# Altium PCB PCB尺子2.PcbDoc (part 3 of 3)
Units mm, origin at the board's own origin, x right, y up, seen from the top; angles counter-clockwise.
Board outline 210 x 35 mm, 2 copper layers (Top Layer, Bottom Layer); 21 components, 0 nets, 1047 pads, 0 vias.
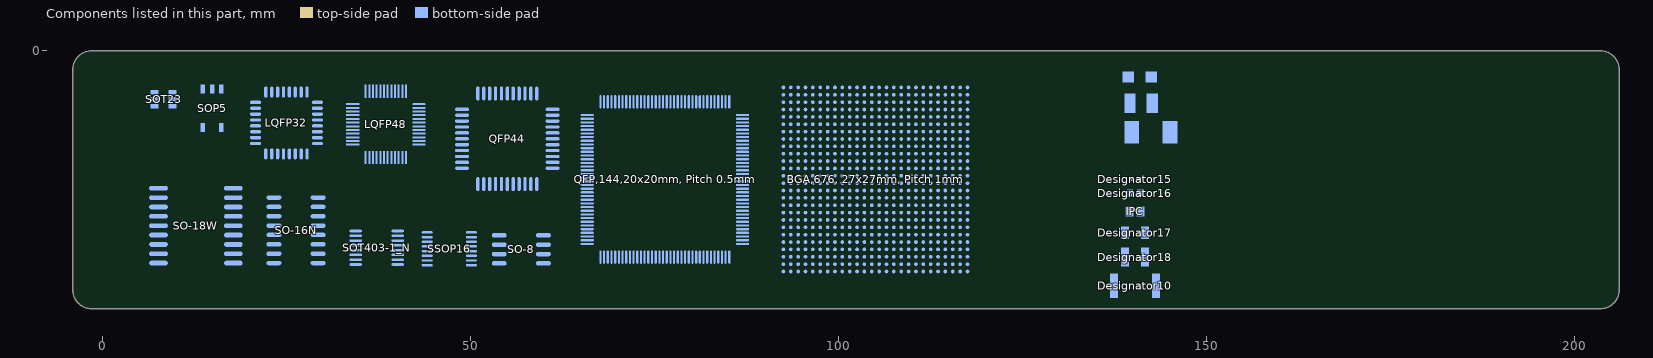
[diagram p3: the components of this part, seen from the top]

## Nets (pads, with @x,y where several pads share a name; then routed paths per layer and width w, separated by ;. In a path a pad name is that pad's centre, name@x,y a point inside that pad or via, vN(x,y) a via of type N, cw(c..) or ccw(c..) an arc to the next point about the centre after c; other vN are vias at no path point) (continued)
copper on no net: | length 2144.7
  Top Layer w0.2: 200,-4.5 200,0
  Top Layer w0.254: 0,-34.997 0,-31.997 ; 0,-31.972 171.455,-31.972 ; 0,0 0,-2.5 201.9,-2.5 201.9,0 ; 1,-2.5 1,0 ; 1.275,-34.997 1.275,-31.997 ; 2,-2.5 2,0 ; 2.545,-34.997 2.545,-31.997 ; 3,-2.5 3,0 ; 3.815,-34.997 3.815,-31.997 ; 4,-2.5 4,0 ; 5,-3.5 5,0 ; 5.085,-34.997 5.085,-31.997 ; 6,-2.5 6,0 ; 6.355,-34.997 6.355,-31.997 ; 7,-2.5 7,0 ; 7.625,-34.997 7.625,-31.997 ; 8,-2.5 8,0 ; 8.895,-34.997 8.895,-31.997 ; 9,-2.5 9,0 ; 10,-4.5 10,0 ; 10.165,-34.997 10.165,-31.997 ; 11,-2.5 11,0 ; 11.435,-34.997 11.435,-31.997 ; 12,-2.5 12,0 ; 12.705,-34.997 12.705,-30.997 ; 13,-2.5 13,0 ; 13.975,-34.997 13.975,-31.997 ; 14,-2.5 14,0 ; 15,-3.5 15,0 ; 15.245,-34.997 15.245,-31.997 ; 16,-2.5 16,0 ; 16.515,-34.997 16.515,-31.997 ; 17,-2.5 17,0 ; 17.785,-34.997 17.785,-31.997 ; 18,-2.5 18,0 ; 19,-2.5 19,0 ; 19.055,-34.997 19.055,-31.997 ; 20,-4.5 20,0 ; 20.325,-34.997 20.325,-31.997 ; 21,-2.5 21,0 ; 21.595,-34.997 21.595,-31.997 ; 22,-2.5 22,0 ; 22.865,-34.997 22.865,-31.997 ; 23,-2.5 23,0 ; 24,-2.5 24,0 ; 24.135,-34.997 24.135,-31.997 ; 25,-3.5 25,0 ; 25.405,-34.997 25.405,-29.997 ; 26,-2.5 26,0 ; 26.675,-34.997 26.675,-31.997 ; 27,-2.5 27,0 ; 27.945,-34.997 27.945,-31.997 ; 28,-2.5 28,0 ; 29,-2.5 29,0 ; 29.215,-34.997 29.215,-31.997 ; 30,-4.5 30,0 ; 30.485,-34.997 30.485,-31.997 ; 31,-2.5 31,0 ; 31.755,-34.997 31.755,-31.997 ; 32,-2.5 32,0 ; 33,-2.5 33,0 ; 33.025,-34.997 33.025,-31.997 ; 34,-2.5 34,0 ; 34.295,-34.997 34.295,-31.997 ; 35,-3.5 35,0 ; 35.565,-34.997 35.565,-31.997 ; 36,-2.5 36,0 ; 36.835,-34.997 36.835,-31.997 ; 37,-2.5 37,0 ; 38,-2.5 38,0 ; 38.105,-34.997 38.105,-30.997 ; 39,-2.5 39,0 ; 39.375,-34.997 39.375,-31.997 ; 40,-4.5 40,0 ; 40.645,-34.997 40.645,-31.997 ; 41,-2.5 41,0 ; 41.915,-34.997 41.915,-31.997 ; 42,-2.5 42,0 ; 43,-2.5 43,0 ; 43.185,-34.997 43.185,-31.997 ; 44,-2.5 44,0 ; 44.455,-34.997 44.455,-31.997 ; 45,-3.5 45,0 ; 45.725,-34.997 45.725,-31.997 ; 46,-2.5 46,0 ; 46.995,-34.997 46.995,-31.997 ; 47,-2.5 47,0 ; 48,-2.5 48,0 ; 48.265,-34.997 48.265,-31.997 ; 49,-2.5 49,0 ; 49.535,-34.997 49.535,-31.997 ; 50,-4.5 50,0 ; 50.805,-34.997 50.805,-29.997 ; 51,-2.5 51,0 ; 52,-2.5 52,0 ; 52.075,-34.997 52.075,-31.997 ; 53,-2.5 53,0 ; 53.345,-34.997 53.345,-31.997 ; 54,-2.5 54,0 ; 54.615,-34.997 54.615,-31.997 ; 55,-3.5 55,0 ; 55.885,-34.997 55.885,-31.997 ; 56,-2.5 56,0 ; 57,-2.5 57,0 ; 57.155,-34.997 57.155,-31.997 ; 58,-2.5 58,0 ; 58.425,-34.997 58.425,-31.997 ; 59,-2.5 59,0 ; 59.695,-34.997 59.695,-31.997 ; 60,-4.5 60,0 ; 60.965,-34.997 60.965,-31.997 ; 61,-2.5 61,0 ; 62,-2.5 62,0 ; 62.235,-34.997 62.235,-31.997 ; 63,-2.5 63,0 ; 63.505,-34.997 63.505,-30.997 ; 64,-2.5 64,0 ; 64.775,-34.997 64.775,-31.997 ; 65,-3.5 65,0 ; 66,-2.5 66,0 ; 66.045,-34.997 66.045,-31.997 ; 67,-2.5 67,0 ; 67.315,-34.997 67.315,-31.997 ; 68,-2.5 68,0 ; 68.585,-34.997 68.585,-31.997 ; 69,-2.5 69,0 ; 69.855,-34.997 69.855,-31.997 ; 70,-4.5 70,0 ; 71,-2.5 71,0 ; 71.125,-34.997 71.125,-31.997 ; 72,-2.5 72,0 ; 72.395,-34.997 72.395,-31.997 ; 73,-2.5 73,0 ; 73.665,-34.997 73.665,-31.997 ; 74,-2.5 74,0 ; 74.935,-34.997 74.935,-31.997 ; 75,-3.5 75,0 ; 76,-2.5 76,0 ; 76.205,-34.997 76.205,-29.997 ; 77,-2.5 77,0 ; 77.475,-34.997 77.475,-31.997 ; 78,-2.5 78,0 ; 78.745,-34.997 78.745,-31.997 ; 79,-2.5 79,0 ; 80,-4.5 80,0 ; 80.015,-34.997 80.015,-31.997 ; 81,-2.5 81,0 ; 81.285,-34.997 81.285,-31.997 ; 82,-2.5 82,0 ; 82.555,-34.997 82.555,-31.997 ; 83,-2.5 83,0 ; 83.825,-34.997 83.825,-31.997 ; 84,-2.5 84,0 ; 85,-3.5 85,0 ; 85.095,-34.997 85.095,-31.997 ; 86,-2.5 86,0 ; 86.365,-34.997 86.365,-31.997 ; 87,-2.5 87,0 ; 87.635,-34.997 87.635,-31.997 ; 88,-2.5 88,0 ; 88.905,-34.997 88.905,-30.997 ; 89,-2.5 89,0 ; 90,-4.5 90,0 ; 90.175,-34.997 90.175,-31.997 ; 91,-2.5 91,0 ; 91.445,-34.997 91.445,-31.997 ; 92,-2.5 92,0 ; 92.715,-34.997 92.715,-31.997 ; 93,-2.5 93,0 ; 93.985,-34.997 93.985,-31.997 ; 94,-2.5 94,0 ; 95,-3.5 95,0 ; 95.255,-34.997 95.255,-31.997 ; 96,-2.5 96,0 ; 96.525,-34.997 96.525,-31.997 ; 97,-2.5 97,0 ; 97.795,-34.997 97.795,-31.997 ; 98,-2.5 98,0 ; 99,-2.5 99,0 ; 99.065,-34.997 99.065,-31.997 ; 100,-4.5 100,0 ; 100.335,-34.997 100.335,-31.997 ; 101,-2.5 101,0 ; 101.605,-34.997 101.605,-29.997 ; 102,-2.5 102,0 ; 102.875,-34.997 102.875,-31.997 ; 103,-2.5 103,0 ; 104,-2.5 104,0 ; 104.145,-34.997 104.145,-31.997 ; 105,-3.5 105,0 ; 105.415,-34.997 105.415,-31.997 ; 106,-2.5 106,0 ; 106.685,-34.997 106.685,-31.997 ; 107,-2.5 107,0 ; 107.955,-34.997 107.955,-31.997 ; 108,-2.5 108,0 ; 109,-2.5 109,0 ; 109.225,-34.997 109.225,-31.997 ; 110,-4.5 110,0 ; 110.495,-34.997 110.495,-31.997 ; 111,-2.5 111,0 ; 111.765,-34.997 111.765,-31.997 ; 112,-2.5 112,0 ; 113,-2.5 113,0 ; 113.035,-34.997 113.035,-31.997 ; 114,-2.5 114,0 ; 114.305,-34.997 114.305,-30.997 ; 115,-3.5 115,0 ; 115.575,-34.997 115.575,-31.997 ; 116,-2.5 116,0 ; 116.845,-34.997 116.845,-31.997 ; 117,-2.5 117,0 ; 118,-2.5 118,0 ; 118.115,-34.997 118.115,-31.997 ; 119,-2.5 119,0 ; 119.385,-34.997 119.385,-31.997 ; 120,-4.5 120,0 ; 120.655,-34.997 120.655,-31.997 ; 121,-2.5 121,0 ; 121.925,-34.997 121.925,-31.997 ; 122,-2.5 122,0 ; 123,-2.5 123,0 ; 123.195,-34.997 123.195,-31.997 ; 124,-2.5 124,0 ; 124.465,-34.997 124.465,-31.997 ; 125,-3.5 125,0 ; 125.735,-34.997 125.735,-31.997 ; 126,-2.5 126,0 ; 127,-2.5 127,0 ; 127.005,-34.997 127.005,-29.997 ; 128,-2.5 128,0 ; 128.275,-34.997 128.275,-31.997 ; 129,-2.5 129,0 ; 129.545,-34.997 129.545,-31.997 ; 130,-4.5 130,0 ; 130.815,-34.997 130.815,-31.997 ; 131,-2.5 131,0 ; 132,-2.5 132,0 ; 132.085,-34.997 132.085,-31.997 ; 133,-2.5 133,0 ; 133.355,-34.997 133.355,-31.997 ; 134,-2.5 134,0 ; 134.625,-34.997 134.625,-31.997 ; 135,-3.5 135,0 ; 135.895,-34.997 135.895,-31.997 ; 136,-2.5 136,0 ; 137,-2.5 137,0 ; 137.165,-34.997 137.165,-31.997 ; 138,-2.5 138,0 ; 138.435,-34.997 138.435,-31.997 ; 139,-2.5 139,0 ; 139.705,-34.997 139.705,-30.997 ; 140,-4.5 140,0 ; 140.975,-34.997 140.975,-31.997 ; 141,-2.5 141,0 ; 142,-2.5 142,0 ; 142.245,-34.997 142.245,-31.997 ; 143,-2.5 143,0 ; 143.515,-34.997 143.515,-31.997 ; 144,-2.5 144,0 ; 144.785,-34.997 144.785,-31.997 ; 145,-3.5 145,0 ; 146,-2.5 146,0 ; 146.055,-34.997 146.055,-31.997 ; 147,-2.5 147,0 ; 147.325,-34.997 147.325,-31.997 ; 148,-2.5 148,0 ; 148.595,-34.997 148.595,-31.997 ; 149,-2.5 149,0 ; 149.865,-34.997 149.865,-31.997 ; 150,-4.5 150,0 ; 151,-2.5 151,0 ; 151.135,-34.997 151.135,-31.997 ; 152,-2.5 152,0 ; 152.405,-34.997 152.405,-29.997 ; 153,-2.5 153,0 ; 153.675,-34.997 153.675,-31.997 ; 154,-2.5 154,0 ; 154.945,-34.997 154.945,-31.997 ; 155,-3.5 155,0 ; 156,-2.5 156,0 ; 156.215,-34.997 156.215,-31.997 ; 157,-2.5 157,0 ; 157.485,-34.997 157.485,-31.997 ; 158,-2.5 158,0 ; 158.755,-34.997 158.755,-31.997 ; 159,-2.5 159,0 ; 160,-4.5 160,0 ; 160.025,-34.997 160.025,-31.997 ; 161,-2.5 161,0 ; 161.295,-34.997 161.295,-31.997 ; 162,-2.5 162,0 ; 162.565,-34.997 162.565,-31.997 ; 163,-2.5 163,0 ; 163.835,-34.997 163.835,-31.997 ; 164,-2.5 164,0 ; 165,-3.5 165,0 ; 165.105,-34.997 165.105,-30.997 ; 166,-2.5 166,0 ; 166.375,-34.997 166.375,-31.997 ; 167,-2.5 167,0 ; 167.645,-34.997 167.645,-31.997 ; 168,-2.5 168,0 ; 168.915,-34.997 168.915,-31.997 ; 169,-2.5 169,0 ; 170,-4.5 170,0 ; 170.185,-34.997 170.185,-31.997 ; 171,-2.5 171,0 ; 171.455,-34.997 171.455,-31.997 ; 172,-2.5 172,0 ; 173,-2.5 173,0 ; 174,-2.5 174,0 ; 174.178,-19.332 174.686,-19.332 ; 174.178,-19.078 174.432,-19.078 ; 174.178,-18.824 174.432,-18.824 ; 174.178,-18.57 174.432,-18.57 ; 174.178,-18.316 174.432,-18.316 ; 174.178,-18.062 174.432,-18.062 ; 174.178,-17.808 174.432,-17.808 ; 174.178,-17.554 174.432,-17.554 ; 174.178,-17.3 174.432,-17.3 ; 174.178,-17.046 174.432,-17.046 ; 174.178,-16.792 174.432,-16.792 ; 174.178,-16.538 174.432,-16.538 ; 174.178,-16.284 174.432,-16.284 ; 174.178,-16.03 174.686,-16.03 ; 174.432,-20.348 174.686,-20.348 ; 174.432,-20.094 174.686,-20.094 ; 174.432,-19.84 174.686,-19.84 ; 174.432,-19.586 174.686,-19.586 ; 174.432,-15.776 174.686,-15.776 ; 174.432,-15.522 174.686,-15.522 ; 174.432,-15.268 174.686,-15.268 ; 174.432,-15.014 174.686,-15.014 ; 174.432,-14.76 174.94,-14.76 ; 174.686,-21.11 174.94,-21.11 ; 174.686,-20.856 174.94,-20.856 ; 174.686,-20.602 174.94,-20.602 ; 174.686,-14.506 174.94,-14.506 ; 174.686,-14.252 174.94,-14.252 ; 174.686,-13.998 175.194,-13.998 ; 174.94,-21.872 175.448,-21.872 ; 174.94,-21.618 175.194,-21.618 ; 174.94,-21.364 175.194,-21.364 ; 174.94,-13.744 175.194,-13.744 ; 174.94,-13.49 175.194,-13.49 ; 175,-3.5 175,0 ; 175.194,-22.38 175.702,-22.38 ; 175.194,-22.126 175.448,-22.126 ; 175.194,-13.236 175.448,-13.236 ; 175.194,-12.982 175.448,-12.982 ; 175.448,-22.888 175.956,-22.888 ; 175.448,-22.634 175.702,-22.634 ; 175.448,-12.728 175.702,-12.728 ; 175.448,-12.474 175.702,-12.474 ; 175.702,-23.142 175.956,-23.142 ; 175.702,-12.22 175.956,-12.22 ; 175.702,-11.966 176.21,-11.966 ; 175.956,-23.65 193.228,-23.65 ; 175.956,-23.396 176.21,-23.396 ; 175.956,-20.856 181.29,-20.856 ; 175.956,-20.602 181.29,-20.602 ; 175.956,-20.348 177.988,-20.348 ; 175.956,-20.094 177.988,-20.094 ; 175.956,-19.84 177.988,-19.84 ; 175.956,-19.586 177.988,-19.586 ; 175.956,-19.332 177.988,-19.332 ; 175.956,-19.078 177.988,-19.078 ; 175.956,-18.824 177.988,-18.824 ; 175.956,-18.57 177.988,-18.57 ; 175.956,-18.316 177.988,-18.316 ; 175.956,-18.062 177.988,-18.062 ; 175.956,-17.808 177.988,-17.808 ; 175.956,-17.554 177.988,-17.554 ; 175.956,-17.3 177.988,-17.3 ; 175.956,-17.046 177.988,-17.046 ; 175.956,-16.792 177.988,-16.792 ; 175.956,-16.538 177.988,-16.538 ; 175.956,-16.284 177.988,-16.284 ; 175.956,-16.03 177.988,-16.03 ; 175.956,-15.776 177.988,-15.776 ; 175.956,-15.522 177.988,-15.522 ; 175.956,-15.268 177.988,-15.268 ; 175.956,-15.014 177.988,-15.014 ; 175.956,-14.76 181.29,-14.76 ; 175.956,-14.506 181.29,-14.506 ; 175.956,-14.252 181.29,-14.252 ; 175.956,-11.712 193.482,-11.712 ; 176,-2.5 176,0 ; 176.21,-23.904 176.464,-23.904 ; 176.21,-21.364 181.036,-21.364 ; 176.21,-21.11 181.29,-21.11 ; 176.21,-13.998 181.29,-13.998 ; 176.21,-11.458 176.464,-11.458 ; 176.464,-24.158 176.718,-24.158 ; 176.464,-23.396 178.496,-23.396 ; 176.464,-13.744 181.036,-13.744 ; 176.464,-11.204 176.718,-11.204 ; 176.464,-10.95 176.972,-10.95 ; 176.718,-24.412 176.972,-24.412 ; 176.718,-21.618 180.782,-21.618 ; 176.718,-10.696 177.226,-10.696 ; 176.972,-24.666 177.226,-24.666 ; 176.972,-10.442 177.48,-10.442 ; 177,-2.5 177,0 ; 177.226,-24.92 177.48,-24.92 ; 177.226,-13.49 180.02,-13.49 ; 177.226,-10.188 177.734,-10.188 ; 177.48,-25.174 177.734,-25.174 ; 177.48,-9.934 177.988,-9.934 ; 177.734,-25.428 177.988,-25.428 ; 177.734,-9.68 178.242,-9.68 ; 177.988,-25.682 178.496,-25.682 ; 177.988,-9.426 191.196,-9.426 ; 178,-2.5 178,0 ; 178.242,-25.936 179.766,-25.936 ; 178.496,-26.19 179.004,-26.19 ; 178.496,-11.458 179.004,-11.458 ; 178.496,-9.172 179.004,-9.172 ; 178.75,-24.158 179.004,-24.158 ; 178.75,-23.904 179.004,-23.904 ; 178.75,-11.204 179.004,-11.204 ; 178.75,-10.95 179.258,-10.95 ; 178.75,-8.918 179.258,-8.918 ; 179,-2.5 179,0 ; 179.004,-26.444 179.512,-26.444 ; 179.004,-25.682 179.258,-25.682 ; 179.004,-24.666 179.512,-24.666 ; 179.004,-24.412 179.258,-24.412 ; 179.004,-23.396 181.036,-23.396 ; 179.004,-10.696 179.258,-10.696 ; 179.258,-26.698 180.02,-26.698 ; 179.258,-24.92 179.512,-24.92 ; 179.258,-20.348 181.29,-20.348 ; 179.258,-19.586 181.29,-19.586 ; 179.258,-10.442 179.512,-10.442 ; 179.258,-10.188 179.766,-10.188 ; 179.258,-8.664 179.766,-8.664 ; 179.512,-25.174 179.766,-25.174 ; 179.512,-20.094 181.29,-20.094 ; 179.512,-19.84 181.29,-19.84 ; 179.512,-19.332 181.29,-19.332 ; 179.512,-16.284 179.766,-16.284 ; 179.512,-16.03 180.274,-16.03 ; 179.512,-15.776 181.036,-15.776 ; 179.512,-15.522 181.29,-15.522 ; 179.512,-15.268 181.29,-15.268 ; 179.512,-15.014 181.29,-15.014 ; 179.512,-9.934 179.766,-9.934 ; 179.512,-8.41 180.274,-8.41 ; 179.766,-26.952 180.528,-26.952 ; 179.766,-25.682 180.274,-25.682 ; 179.766,-25.428 180.02,-25.428 ; 179.766,-9.68 180.02,-9.68 ; 180,-4.5 180,0 ; 180.02,-25.936 189.418,-25.936 ; 180.02,-19.078 181.29,-19.078 ; 180.02,-8.156 180.782,-8.156 ; 180.274,-27.206 181.036,-27.206 ; 180.274,-26.19 180.782,-26.19 ; 180.274,-9.172 180.528,-9.172 ; 180.528,-26.444 181.036,-26.444 ; 180.528,-8.918 180.782,-8.918 ; 180.528,-7.902 181.29,-7.902 ; 180.782,-26.698 181.29,-26.698 ; 180.782,-25.682 181.29,-25.682 ; 180.782,-18.824 181.29,-18.824 ; 180.782,-8.664 181.036,-8.664 ; 181,-2.5 181,0 ; 181.036,-27.46 182.56,-27.46 ; 181.036,-24.158 181.29,-24.158 ; 181.036,-23.904 181.29,-23.904 ; 181.036,-11.458 181.29,-11.458 ; 181.036,-11.204 181.29,-11.204 ; 181.036,-10.95 181.544,-10.95 ; 181.036,-8.41 181.544,-8.41 ; 181.29,-26.952 181.544,-26.952 ; 181.29,-24.92 181.798,-24.92 ; 181.29,-24.666 181.544,-24.666 ; 181.29,-24.412 181.544,-24.412 ; 181.29,-23.396 188.148,-23.396 ; 181.29,-10.696 181.544,-10.696 ; 181.29,-10.442 181.544,-10.442 ; 181.29,-7.648 182.814,-7.648 ; 181.544,-27.206 182.052,-27.206 ; 181.544,-25.682 182.052,-25.682 ; 181.544,-25.428 181.798,-25.428 ; 181.544,-25.174 181.798,-25.174 ; 181.544,-10.188 181.798,-10.188 ; 181.544,-9.934 181.798,-9.934 ; 181.544,-9.68 182.052,-9.68 ; 181.544,-8.156 181.798,-8.156 ; 181.544,-7.902 182.306,-7.902 ; 181.798,-27.714 183.83,-27.714 ; 182,-2.5 182,0 ; 182.052,-26.19 182.306,-26.19 ; 182.052,-9.172 182.306,-9.172 ; 182.052,-8.918 182.306,-8.918 ; 182.306,-26.698 182.814,-26.698 ; 182.306,-26.444 182.56,-26.444 ; 182.306,-25.682 186.878,-25.682 ; 182.306,-21.11 187.64,-21.11 ; 182.306,-20.856 187.64,-20.856 ; 182.306,-20.602 187.64,-20.602 ; 182.306,-20.348 184.338,-20.348 ; 182.306,-20.094 184.338,-20.094 ; 182.306,-19.84 184.338,-19.84 ; 182.306,-19.586 184.338,-19.586 ; 182.306,-19.332 184.338,-19.332 ; 182.306,-19.078 184.338,-19.078 ; 182.306,-18.824 184.338,-18.824 ; 182.306,-18.57 184.338,-18.57 ; 182.306,-18.316 184.338,-18.316 ; 182.306,-18.062 184.338,-18.062 ; 182.306,-17.808 184.338,-17.808 ; 182.306,-17.554 184.338,-17.554 ; 182.306,-17.3 184.338,-17.3 ; 182.306,-17.046 184.338,-17.046 ; 182.306,-16.792 184.338,-16.792 ; 182.306,-16.538 184.338,-16.538 ; 182.306,-16.284 184.338,-16.284 ; 182.306,-16.03 184.338,-16.03 ; 182.306,-15.776 184.338,-15.776 ; 182.306,-15.522 184.338,-15.522 ; 182.306,-15.268 184.338,-15.268 ; 182.306,-15.014 184.338,-15.014 ; 182.306,-14.76 187.64,-14.76 ; 182.306,-14.506 187.64,-14.506 ; 182.306,-14.252 187.64,-14.252 ; 182.306,-8.664 182.56,-8.664 ; 182.306,-7.394 184.338,-7.394 ; 182.56,-26.952 182.814,-26.952 ; 182.56,-21.364 187.64,-21.364 ; 182.56,-13.998 187.386,-13.998 ; 182.56,-8.41 182.814,-8.41 ; 182.814,-27.968 186.624,-27.968 ; 182.814,-27.206 183.068,-27.206 ; 182.814,-13.744 187.132,-13.744 ; 182.814,-8.156 183.068,-8.156 ; 183,-2.5 183,0 ; 183.068,-27.46 183.322,-27.46 ; 183.068,-21.618 187.64,-21.618 ; 183.068,-7.902 183.322,-7.902 ; 183.068,-7.648 183.576,-7.648 ; 183.576,-13.49 186.37,-13.49 ; 183.83,-7.14 185.354,-7.14 ; 184,-2.5 184,0 ; 184.846,-18.824 185.1,-18.824 ; 184.846,-18.57 187.64,-18.57 ; 184.846,-18.316 187.64,-18.316 ; 184.846,-18.062 187.64,-18.062 ; 184.846,-17.808 187.64,-17.808 ; 184.846,-17.554 187.64,-17.554 ; 185,-3.5 185,0 ; 185.1,-17.3 187.64,-17.3 ; 185.1,-7.394 187.132,-7.394 ; 185.608,-27.714 187.64,-27.714 ; 185.608,-20.348 187.64,-20.348 ; 185.608,-20.094 187.64,-20.094 ; 185.608,-19.84 187.64,-19.84 ; 185.608,-19.586 187.64,-19.586 ; 185.608,-19.332 187.64,-19.332 ; 185.608,-19.078 187.64,-19.078 ; 185.608,-18.824 187.64,-18.824 ; 185.608,-16.284 186.37,-16.284 ; 185.608,-16.03 186.878,-16.03 ; 185.608,-15.776 187.64,-15.776 ; 185.608,-15.522 187.64,-15.522 ; 185.608,-15.268 187.64,-15.268 ; 185.608,-15.014 187.64,-15.014 ; 185.608,-7.648 186.37,-7.648 ; 185.862,-27.46 186.37,-27.46 ; 185.862,-17.046 187.64,-17.046 ; 186,-2.5 186,0 ; 186.116,-27.206 186.624,-27.206 ; 186.116,-7.902 186.37,-7.902 ; 186.37,-26.952 186.878,-26.952 ; 186.37,-8.156 186.624,-8.156 ; 186.624,-26.698 187.132,-26.698 ; 186.624,-16.792 187.64,-16.792 ; 186.624,-8.41 186.878,-8.41 ; 186.624,-7.648 188.148,-7.648 ; 186.878,-27.46 188.402,-27.46 ; 186.878,-26.444 187.132,-26.444 ; 186.878,-8.918 187.386,-8.918 ; 186.878,-8.664 187.132,-8.664 ; 187,-2.5 187,0 ; 187.132,-26.19 187.386,-26.19 ; 187.132,-9.172 187.386,-9.172 ; 187.132,-7.902 187.64,-7.902 ; 187.386,-27.206 187.894,-27.206 ; 187.386,-25.682 187.894,-25.682 ; 187.386,-25.428 187.64,-25.428 ; 187.386,-16.538 187.64,-16.538 ; 187.386,-9.68 187.64,-9.68 ; 187.64,-26.952 188.148,-26.952 ; 187.64,-25.174 187.894,-25.174 ; 187.64,-24.92 188.148,-24.92 ; 187.64,-10.442 188.148,-10.442 ; 187.64,-10.188 187.894,-10.188 ; 187.64,-9.934 187.894,-9.934 ; 187.64,-8.156 187.894,-8.156 ; 187.894,-24.666 188.148,-24.666 ; 187.894,-24.412 188.148,-24.412 ; 187.894,-24.158 188.402,-24.158 ; 187.894,-10.95 188.148,-10.95 ; 187.894,-10.696 188.148,-10.696 ; 187.894,-8.41 188.402,-8.41 ; 188,-2.5 188,0 ; 188.148,-26.698 188.402,-26.698 ; 188.148,-25.682 188.656,-25.682 ; 188.148,-23.904 188.402,-23.904 ; 188.148,-11.458 188.402,-11.458 ; 188.148,-11.204 188.402,-11.204 ; 188.148,-8.664 188.656,-8.664 ; 188.148,-7.902 188.656,-7.902 ; 188.402,-27.206 189.164,-27.206 ; 188.402,-26.444 188.91,-26.444 ; 188.402,-23.396 190.434,-23.396 ; 188.656,-26.19 189.164,-26.19 ; 188.656,-21.618 193.482,-21.618 ; 188.656,-21.364 193.482,-21.364 ; 188.656,-21.11 193.482,-21.11 ; 188.656,-20.856 193.482,-20.856 ; 188.656,-20.602 193.482,-20.602 ; 188.656,-20.348 190.688,-20.348 ; 188.656,-20.094 190.688,-20.094 ; 188.656,-19.84 190.688,-19.84 ; 188.656,-19.586 190.688,-19.586 ; 188.656,-19.332 190.688,-19.332 ; 188.656,-19.078 190.688,-19.078 ; 188.656,-18.824 190.688,-18.824 ; 188.656,-18.57 190.688,-18.57 ; 188.656,-18.316 190.942,-18.316 ; 188.656,-18.062 191.704,-18.062 ; 188.656,-17.808 192.466,-17.808 ; 188.656,-17.554 192.974,-17.554 ; 188.656,-17.3 193.482,-17.3 ; 188.656,-17.046 193.482,-17.046 ; 188.656,-16.792 190.688,-16.792 ; 188.656,-16.538 190.688,-16.538 ; 188.656,-16.284 190.688,-16.284 ; 188.656,-16.03 190.688,-16.03 ; 188.656,-15.776 190.688,-15.776 ; 188.656,-15.522 190.688,-15.522 ; 188.656,-15.268 190.688,-15.268 ; 188.656,-15.014 190.688,-15.014 ; 188.656,-14.76 193.228,-14.76 ; 188.656,-14.506 193.482,-14.506 ; 188.656,-14.252 193.482,-14.252 ; 188.656,-13.998 193.482,-13.998 ; 188.656,-13.744 193.482,-13.744 ; 188.656,-13.49 193.228,-13.49 ; 188.656,-9.172 189.164,-9.172 ; 188.656,-8.918 188.91,-8.918 ; 188.656,-8.156 189.418,-8.156 ; 188.91,-26.952 189.672,-26.952 ; 189,-2.5 189,0 ; 189.164,-25.682 189.672,-25.682 ; 189.164,-8.41 189.672,-8.41 ; 189.418,-26.698 189.926,-26.698 ; 189.418,-25.428 189.672,-25.428 ; 189.418,-9.934 189.926,-9.934 ; 189.418,-9.68 189.672,-9.68 ; 189.672,-25.936 191.196,-25.936 ; 189.672,-25.174 189.926,-25.174 ; 189.672,-10.188 189.926,-10.188 ; 189.672,-8.664 190.18,-8.664 ; 189.926,-26.444 190.434,-26.444 ; 189.926,-25.682 190.434,-25.682 ; 189.926,-24.92 190.18,-24.92 ; 189.926,-24.666 190.434,-24.666 ; 189.926,-10.442 190.18,-10.442 ; 190,-4.5 190,0 ; 190.18,-24.412 190.434,-24.412 ; 190.18,-24.158 190.688,-24.158 ; 190.18,-10.95 190.434,-10.95 ; 190.18,-10.696 190.434,-10.696 ; 190.18,-8.918 190.688,-8.918 ; 190.434,-26.19 190.688,-26.19 ; 190.434,-23.904 190.688,-23.904 ; 190.434,-11.458 190.942,-11.458 ; 190.434,-11.204 190.688,-11.204 ; 190.434,-9.172 190.942,-9.172 ; 190.942,-25.682 191.45,-25.682 ; 190.942,-23.396 192.72,-23.396 ; 190.942,-16.792 193.482,-16.792 ; 191,-2.5 191,0 ; 191.196,-9.68 191.704,-9.68 ; 191.45,-25.428 191.704,-25.428 ; 191.45,-9.934 191.958,-9.934 ; 191.704,-25.174 191.958,-25.174 ; 191.704,-16.538 193.482,-16.538 ; 191.704,-10.188 192.212,-10.188 ; 191.958,-24.92 192.212,-24.92 ; 191.958,-10.442 192.466,-10.442 ; 192,-2.5 192,0 ; 192.212,-24.666 192.466,-24.666 ; 192.212,-10.696 192.72,-10.696 ; 192.466,-24.412 192.72,-24.412 ; 192.466,-16.284 193.482,-16.284 ; 192.466,-10.95 192.72,-10.95 ; 192.72,-24.158 192.974,-24.158 ; 192.72,-23.904 193.228,-23.904 ; 192.72,-11.204 192.974,-11.204 ; 192.974,-23.396 193.482,-23.396 ; 192.974,-11.458 193.228,-11.458 ; 193,-2.5 193,0 ; 193.228,-23.142 193.736,-23.142 ; 193.228,-16.03 193.482,-16.03 ; 193.228,-11.966 193.482,-11.966 ; 193.482,-22.888 193.736,-22.888 ; 193.482,-12.474 193.99,-12.474 ; 193.482,-12.22 193.736,-12.22 ; 193.736,-22.634 193.99,-22.634 ; 193.736,-22.38 193.99,-22.38 ; 193.736,-12.982 194.244,-12.982 ; 193.736,-12.728 193.99,-12.728 ; 193.99,-22.126 194.244,-22.126 ; 193.99,-21.872 194.244,-21.872 ; 193.99,-13.49 194.498,-13.49 ; 193.99,-13.236 194.244,-13.236 ; 194,-2.5 194,0 ; 194.244,-21.618 194.498,-21.618 ; 194.244,-21.364 194.498,-21.364 ; 194.244,-21.11 194.752,-21.11 ; 194.244,-13.998 194.498,-13.998 ; 194.244,-13.744 194.498,-13.744 ; 194.498,-20.856 194.752,-20.856 ; 194.498,-20.602 194.752,-20.602 ; 194.498,-20.348 195.006,-20.348 ; 194.498,-15.014 195.006,-15.014 ; 194.498,-14.76 194.752,-14.76 ; 194.498,-14.506 194.752,-14.506 ; 194.498,-14.252 194.752,-14.252 ; 194.752,-20.094 195.006,-20.094 ; 194.752,-19.84 195.006,-19.84 ; 194.752,-19.586 195.006,-19.586 ; 194.752,-19.332 195.006,-19.332 ; 194.752,-19.078 195.26,-19.078 ; 194.752,-16.284 195.26,-16.284 ; 194.752,-16.03 195.006,-16.03 ; 194.752,-15.776 195.006,-15.776 ; 194.752,-15.522 195.006,-15.522 ; 194.752,-15.268 195.006,-15.268 ; 195,-3.5 195,0 ; 195.006,-18.824 195.26,-18.824 ; 195.006,-18.57 195.26,-18.57 ; 195.006,-18.316 195.26,-18.316 ; 195.006,-18.062 195.26,-18.062 ; 195.006,-17.808 195.26,-17.808 ; 195.006,-17.554 195.26,-17.554 ; 195.006,-17.3 195.26,-17.3 ; 195.006,-17.046 195.26,-17.046 ; 195.006,-16.792 195.26,-16.792 ; 195.006,-16.538 195.26,-16.538 ; 196,-2.5 196,0 ; 197,-2.5 197,0 ; 198,-2.5 198,0 ; 199,-2.5 199,0 ; 201,-2.5 201,0
  Bottom Layer w0.254: -0.397,-9.394 ccw(c0,-9.6) 0.358,-9.332 ; 1,-9.6 ccw(c0,-9.6) 1,-9.6
  Bottom Layer w0.3: 169.5,-34.8 169.5,-0.3
  Bottom Layer w0.53: 167.2,-34.6 167.2,-0.4
  Bottom Layer w0.78: 164.4,-34.5 164.4,-0.5
  Bottom Layer w1.1: 161.2,-34.3 161.2,-0.7
  Bottom Layer w1.37: 157.8,-34.2 157.9,-0.8
  Bottom Layer w2.03: 153.6,-33.9 153.7,-1.1

## Other copper
Top Layer:
  text "201.9" at 202.3,-2.8 h1.5
  text "毫米" at -2,-5.25 h3
  text "1" at 8.6,-5.4 h4
  text "11" at 108.4,-5.4 h4
  text "3" at 28.1,-5.5 h4
  text "8" at 77.8,-5.5 h4
  text "9" at 87.8,-5.5 h4
  text "10" at 98.5,-5.5 h4
  text "12" at 118.5,-5.5 h4
  text "13" at 128.5,-5.5 h4
  text "14" at 138.6,-5.5 h4
  text "15" at 148.722,-5.5 h4
  text "16" at 158.7,-5.5 h4
  text "17" at 168.7,-5.5 h4
  text "18" at 178.5,-5.5 h4
  text "19" at 188.6,-5.5 h4
  text "20" at 198.1,-5.5 h4
  text "2" at 18,-5.6 h4
  text "4" at 37.8,-5.6 h4
  text "5" at 47.9,-5.6 h4
  text "6" at 58,-5.6 h4
  text "7" at 67.9,-5.6 h4
  text "MM" at -1,-8.25 h2
  text "1000" at 21.976,-29.333 h4
  text "2000" at 47.122,-29.333 h4
  text "3000" at 72.776,-29.333 h4
  text "4000" at 97.922,-29.333 h4
  text "5000" at 123.322,-29.333 h4
  text "6000" at 148.722,-29.333 h4
  text "500" at 9.911,-30.222 h4
  text "1500" at 33.533,-30.222 h4
  text "2500" at 59.695,-30.222 h4
  text "3500" at 85.095,-30.222 h4
  text "4500" at 110.495,-30.222 h4
  text "5500" at 135.895,-30.222 h4
  text "6500" at 161.295,-30.222 h4
  text "Mil" at 0,-31.4 h2
Bottom Layer:
  text "ZMH" at -0.5,-8.3 h1.5 r270
  text "引力中心2019年新年留念" at 51.595,-33.7 h5

## Silkscreen, mask and mechanical layers (free items; w line width, h text height)
Top Overlay:
  drawing of 213 lines, arcs and shapes, not listed
Bottom Overlay:
  lines w0.254: 129.2,-13.52 129.2,-0.47 147.3,-0.47 147.3,-13.52 ; 179.004,-27.4 204,-27.4 ; 179.004,-22.1 204,-22.1 ; 179.004,-17.6 204,-17.6 ; 179.004,-14 204,-14 ; 179.004,-10.8 204,-10.8 ; 179.004,-8.4 204,-8.4 ; 185.4,-34.132 185.4,-6.032 ; 190.7,-34.1 190.7,-6 ; 196,-34.1 196,-6 ; 123.612,-34.1 149.769,-34.1 149.769,-13.6 123.612,-13.6 123.612,-34.1 ; 179.004,-34.1 179.004,-6 204,-6 204,-34.1 179.004,-34.1
  text "EIA mm" at 137.1,-2 h1
  text "Res" at 182.6,-3.4 h1
  text "DIA" at 189.1,-3.4 h1
  text "A" at 130.8,-4.047 h0.9
  text "3216" at 136.7,-4.047 h0.9
  text "HOLE" at 201.757,-4.8 h1
  text "mm" at 189,-5.2 h1
  text "mohm/M" at 184.6,-5.3 h1
  text "AWG" at 194.498,-5.4 h1
  text "B" at 130.8,-6.937 h0.9
  text "3528" at 136.7,-6.937 h0.9
  text "20" at 194.4,-7.7 h1
  text "33.9" at 184.1,-7.8 h1
  text ".81" at 189.654,-7.8 h1
  text "18" at 194.4,-10.2 h1.2
  text "21.4" at 184.2,-10.25 h1
  text "1.02" at 189.654,-10.288 h1
  text "C" at 130.8,-10.704 h0.9
  text "6032" at 136.7,-10.704 h0.9
  text "2.03mm-4.0A" at 155.6,-11.5 h1 r270
  text "1.37mm-3.0A" at 159.1,-11.5 h1 r270
  text "1.10mm-2.5A" at 162.3,-11.5 h1 r270
  text "0.78mm-2.0A" at 165.4,-11.5 h1 r270
  text "0.53mm-1.5A" at 167.9,-11.5 h1 r270
  text "0.30mm-1.0A" at 170.2,-11.5 h1 r270
  text "1.63" at 189.654,-13.188 h1
  text "14" at 194.4,-13.2 h1.5
  text "8.45" at 184.1,-13.236 h1
  text "EIA mm" at 149.35,-15.6 h1
  text "Power" at 128.85,-15.7 h1
  text "EIA in" at 135.75,-15.7 h1
  text "RLC" at 142.05,-16 h1.5
  text "2.05" at 189.654,-16.588 h1
  text "12" at 194.5,-16.6 h1.7
  text "5.31" at 183.7,-16.652 h1
  text "1/16W" at 128.3,-17.8 h0.9
  text "0402" at 135.1,-17.8 h0.9
  text "1005" at 147.95,-17.8 h0.9
  text "1/10W" at 128.35,-19.65 h0.9
  text "0603" at 135.15,-19.65 h0.9
  text "1608" at 148,-19.65 h0.9
  text "3.36" at 184.1,-20.602 h1
  text "2.59" at 189.654,-20.688 h1
  text "10" at 194.7,-20.7 h1.9
  text "1/8W" at 127.6,-22.15 h0.9
  text "0805" at 135.15,-22.15 h0.9
  text "2012" at 148,-22.15 h0.9
  text "MAX-detaT-10" at 172.7,-23.07 h1 r270
  text "1/4W" at 127.55,-25.15 h0.9
  text "1206" at 135.1,-25.15 h0.9
  text "3216" at 147.95,-25.15 h0.9
  text "3.26" at 189.654,-25.588 h1
  text "2.11" at 184,-25.739 h1
  text "8" at 194.1,-25.9 h2.1
  text "1/2W" at 127.55,-28.2 h0.9
  text "1210" at 135.1,-28.2 h0.9
  text "3225" at 148.1,-28.2 h0.9
  text "0.84" at 184,-31.471 h1
  text "5.19" at 189.654,-31.588 h1
  text "4" at 194.1,-32 h2.5
  text "1W" at 125.651,-32.3 h0.9
  text "2512" at 135,-32.3 h0.9
  text "6332" at 148,-32.3 h0.9
Top Solder:
  drawing of 764 lines, arcs and shapes, not listed
  text "201.9" at 202.3,-2.8 h1.5
  text "毫米" at -2,-5.25 h3
  text "1" at 8.6,-5.4 h4
  text "11" at 108.4,-5.4 h4
  text "3" at 28.1,-5.5 h4
  text "8" at 77.8,-5.5 h4
  text "9" at 87.8,-5.5 h4
  text "10" at 98.5,-5.5 h4
  text "12" at 118.5,-5.5 h4
  text "13" at 128.5,-5.5 h4
  text "14" at 138.6,-5.5 h4
  text "15" at 148.722,-5.5 h4
  text "16" at 158.7,-5.5 h4
  text "17" at 168.7,-5.5 h4
  text "18" at 178.5,-5.5 h4
  text "19" at 188.6,-5.5 h4
  text "20" at 198.1,-5.5 h4
  text "2" at 18,-5.6 h4
  text "4" at 37.8,-5.6 h4
  text "5" at 47.9,-5.6 h4
  text "6" at 58,-5.6 h4
  text "7" at 67.9,-5.6 h4
  text "MM" at -1,-8.25 h2
  text "1000" at 21.976,-29.333 h4
  text "2000" at 47.122,-29.333 h4
  text "3000" at 72.776,-29.333 h4
  text "4000" at 97.922,-29.333 h4
  text "5000" at 123.322,-29.333 h4
  text "6000" at 148.722,-29.333 h4
  text "500" at 9.911,-30.222 h4
  text "1500" at 33.533,-30.222 h4
  text "2500" at 59.695,-30.222 h4
  text "3500" at 85.095,-30.222 h4
  text "4500" at 110.495,-30.222 h4
  text "5500" at 135.895,-30.222 h4
  text "6500" at 161.295,-30.222 h4
  text "Mil" at 0,-31.4 h2
Bottom Solder:
  circle w0.254: c0,-9.6 r1
  lines w0.254: -0.397,-9.394 ccw(c0,-9.6) 0.358,-9.332
  lines w0.3: 169.5,-34.8 169.5,-0.3
  lines w0.53: 167.2,-34.6 167.2,-0.4
  lines w0.78: 164.4,-34.5 164.4,-0.5
  lines w1.1: 161.2,-34.3 161.2,-0.7
  lines w1.37: 157.8,-34.2 157.9,-0.8
  lines w2.03: 153.6,-33.9 153.7,-1.1
  text "ZMH" at -0.5,-8.3 h1.5 r270
  text "引力中心2019年新年留念" at 51.595,-33.7 h5
Mechanical 1:
  circle w0.254: c200,-19.9 r1.295
  circle w0.254: c200,-15.8 r1.025
  circle w0.254: c200,-12.4 r0.815
  circle w0.254: c200,-24.7 r1.63
  circle w0.254: c200,-30.8 r2.595
  circle w0.254: c200,-9.6 r0.51
  circle w0.254: c200,-7.525 r0.405
  lines w0.254: -4,-32.5 ccw(c-1.5,-32.5) -1.5,-35 203.5,-35 ccw(c203.5,-32.5) 206,-32.5 206,-2.5 ccw(c203.5,-2.5) 203.5,0 -1.5,0 ccw(c-1.5,-2.5) -4,-2.5 -4,-32.5 ; -1.5,-21 ccw(c0,-21) 1.5,-21 1.5,-14 ccw(c0,-14) -1.5,-14 -1.5,-21